# Altium PCB RFID_MODULE_S01.PcbDoc
Units mil, origin at the board's own origin, x right, y up, seen from the top; angles counter-clockwise.
Board outline 2965.03 x 1590.03 mil, 2 copper layers (Top Layer, Bottom Layer); 27 components, 16 nets, 120 pads, 12 vias.
Unrouted connection lines stored in the file: 5.
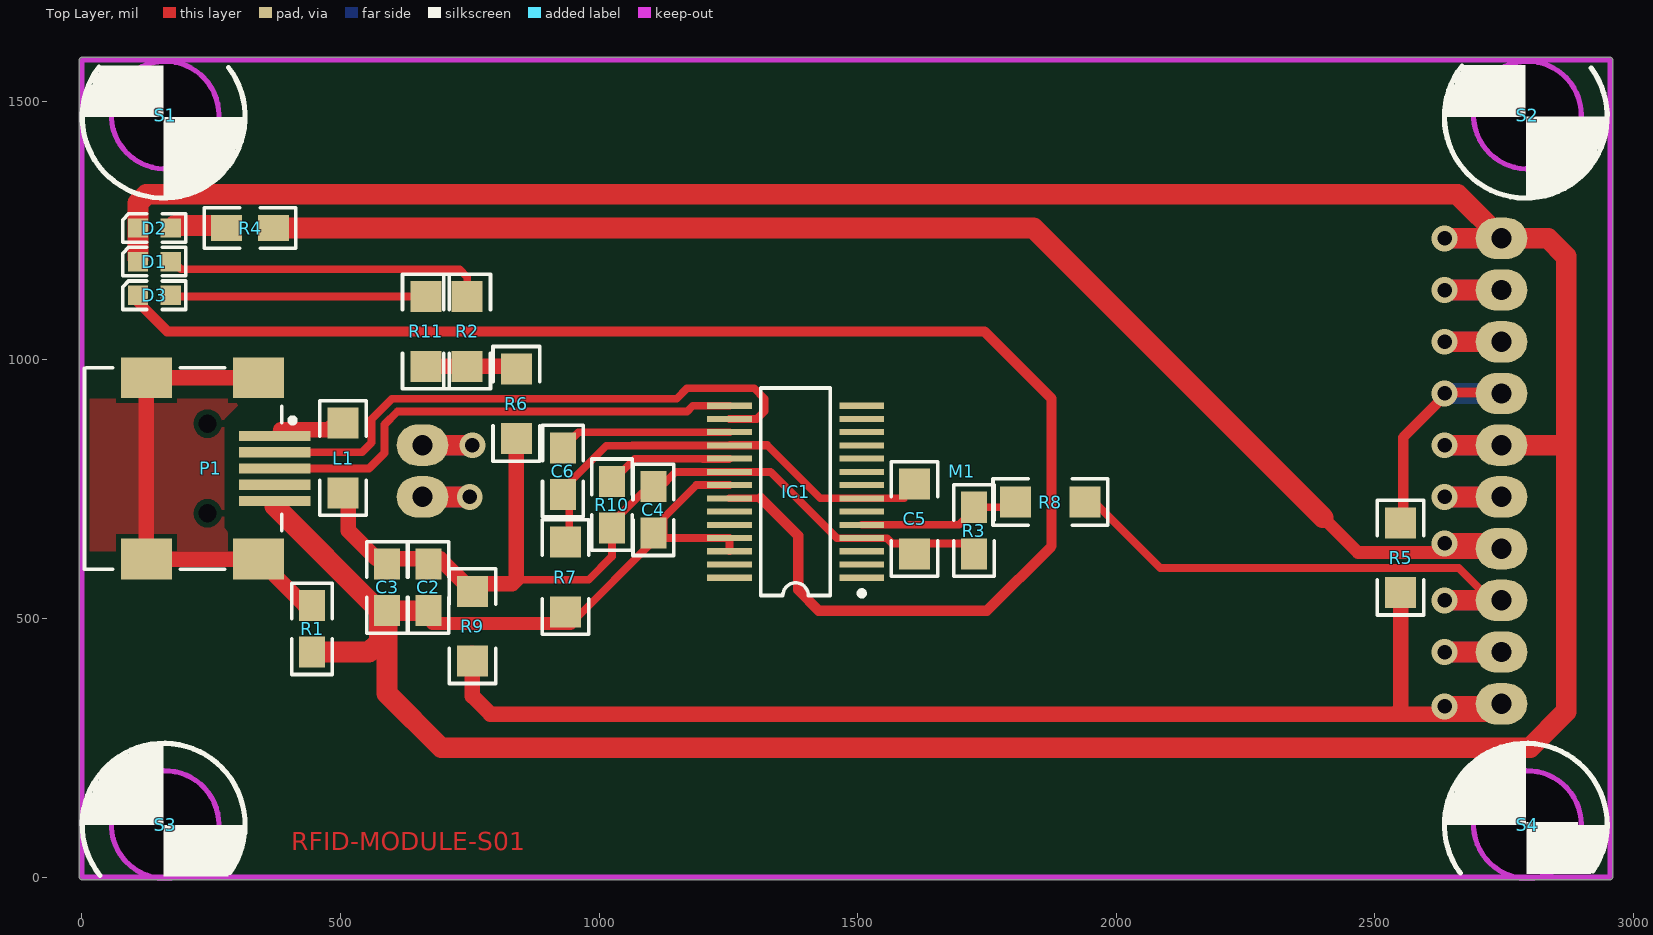
[diagram p0: Top Layer view]
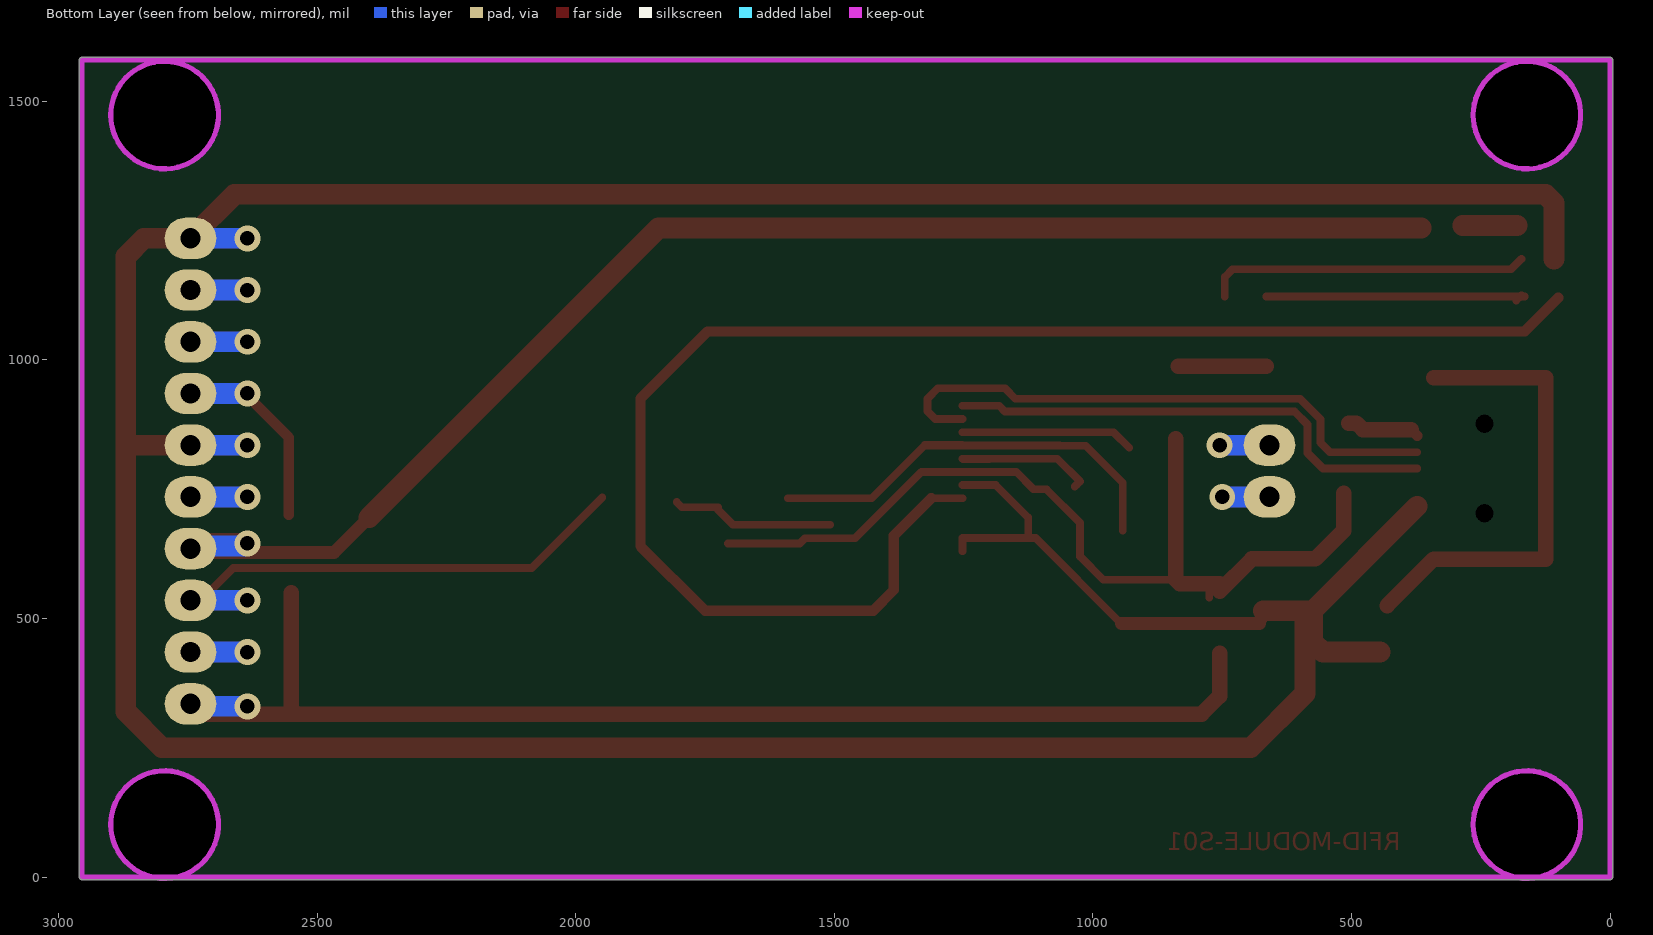
[diagram p1: Bottom Layer view, seen from below]
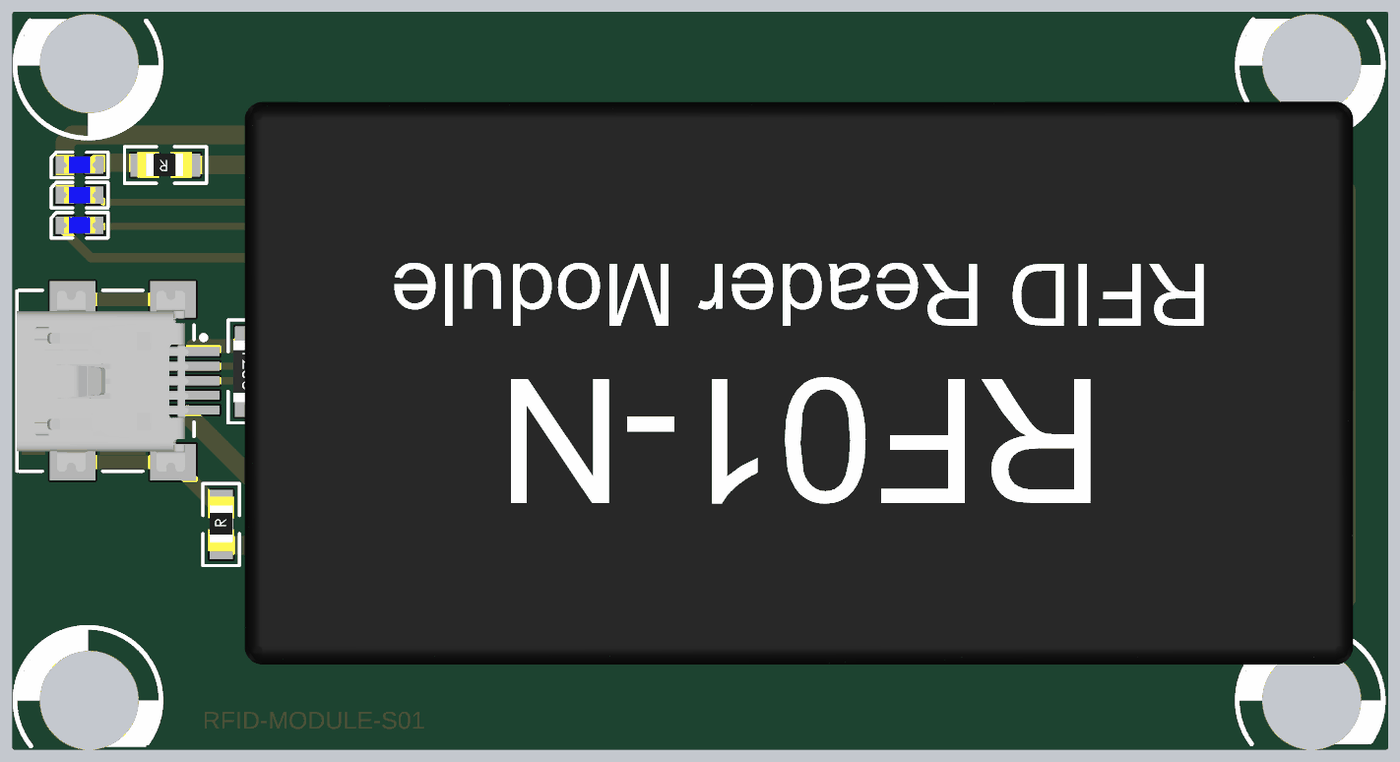
[diagram p2: 3D render of the assembled board from above, using the file's embedded part models]

## Layer stack, top to bottom
Top Solder: solder mask 0.4, Solder Resist, Dk 3.5
Top Layer: signal copper 1.4
Dielectric 1: dielectric 12.6, FR-4, Dk 4.8
Bottom Layer: signal copper 1.4
Bottom Solder: solder mask 0.4, Solder Resist, Dk 3.5

## Board outline
0,-5.01 cw(c0,0) -5.01,0 -5.01,1580 cw(c0,1580) 0,1585.02 2955,1585.02 cw(c2955,1580) 2960.01,1580 2960.01,0 cw(c2955,0) 2955,-5.01

## Design rules (kind name [scope] priority, off if disabled: settings)
Clearance [All] p1: gap=10 ignorepadtopadclearanceinfootprint=FALSE except(0: Arc-Hole Track-Hole SMDPad-Hole THPad-Hole Via-Hole Fill-Hole Poly-Hole Region-Hole Text-Hole)
ComponentClearance [All] p1 off: gap=10 collisioncheckmode=3 verticalgap=10 showdistances=FALSE
PolygonConnect [All] p1: connectstyle=Relief reliefconductorwidth=10 reliefentries=4 polygonreliefangle="90 Angle" airgapwidth=10
RoutingVias [All] p1: holewidth=28 width=50 viastyle="Through Hole" minholewidth=28 minwidth=50 maxholewidth=28 maxwidth=50
SolderMaskExpansion [All] p1: expansion=4
Width [All] p1: maxlimit=100 minlimit=10 preferedwidth=10
29 further rules are at their usual default settings.

## Components (designator, comment, footprint, x,y, rotation, side; value= is the part's Value field where it differs from the comment)
C2 "100nF" "SMD 0805" 670,560 r270 top
C3 "10uF" "SMD 0805" 590,560 r270 top
C4 "100nF" "SMD 0805" 1105,710 r270 top
C5 "100nF" "SMD 1206" 1610,692.5 r90 top
C6 "100nF" "SMD 0805" 930,785 r270 top
D1 "LED_RED" "SMD LED 0603" 140,1190 r180 top
D2 "LED_RED" "SMD LED 0603" 140,1255 r180 top
D3 "LED_RED" "SMD LED 0603" 140,1125 r180 top
IC1 "FT232R" "SMD IC SSOP28" 1380,745 r90 top
L1 "FERRIT_BEAD" "SMD 1206" 505,810 r270 top
M1 "RFID_MODULE" PCBComponent_1 1631.75,787.9 r0 top
P1 "miniUSB" "SMD USB B MINI" 248.82,790 r180 top
R1 "100R" "SMD 0805" 445,480 r90 top
R2 "330R" "SMD 1206" 745,1055 r270 top
R3 "1K" "SMD 0805" 1725,670 r270 top
R4 "470R" "SMD 0805" 325,1255 r180 top
R5 "10K" "SMD 1206" 2550,617.5 r270 top
R6 "0R" "SMD 1206" 840,915 r270 top
R7 "0R" "SMD 1206" 935,580 r90 top
R8 "0R" "SMD 1206" 1872.5,725 r0 top
R9 "0R" "SMD 1206" 755,485 r90 top
R10 "1K" "SMD 0805" 1025,720 r270 top
R11 "330R" "SMD 1206" 665,1055 r270 top
S1 "" screw#1 158.03,1470.28 r270 top
S2 "" screw#2 2792.07,1470.28 r270 top
S3 "" screw#3 158.03,101.18 r270 top
S4 "" screw#4 2792.07,101.18 r270 top

## Footprints (in the part's own frame and the unit in brackets; to place one, negate y for a bottom-side part, rotate by r counter-clockwise, add the part's x,y. Pads: shape width x height; smd on the part's side, far side on the other; paste and mask are expansions set on the pad)
PCBComponent_1 [mil]
  oval 100x80 hole 39.37: 1(1113.25,-452.9) 2(1113.25,-352.9) 3(1113.25,-252.9) 4(1113.25,-152.9) 5(1113.25,-52.9) 6(1113.25,47.1) 7(1113.25,147.1) 8(1113.25,247.1) 9(1113.25,347.1) 10(1113.25,447.1) 11(-973.25,47.1) 12(-973.2,-52.9)
  body extent -1136,-610 1253,603, height 493
screw#1 [mm]
  round 0 hole 5.4: 0(-0.08,0.07)
  silkscreen extent -2.52,-4 4,4
screw#2 [mm]
  round 0 hole 5.4: 0(-0.08,0.078)
  silkscreen extent -2.53,-4.01 4,4
screw#3 [mm]
  round 0 hole 5.4: 0(-0.005,0.07)
  silkscreen extent -4,-4 2.55,4
screw#4 [mm]
  round 0 hole 5.4: 0(-0.005,0.078)
  silkscreen extent -4,-4 2.42,4
"SMD 0805" [mil] "SMD 0805"
  round 27.56 on Mech2: 0(0,0)
  rect 60x50 smd: 1(-45,0) 2(45,0)
  silkscreen extent -88,-39 88,39, body extent -57,-28 61,27, height 21
"SMD 1206" [mil] "SMD 1206"
  round 27.56 on Mech2: 0(0,0)
  rect 60x60 smd: 1(-67.5,0) 2(67.5,0)
  silkscreen extent -111,-45 111,45, body extent -66,-34 66,34, height 33
"SMD IC SSOP28" [mm] "SSOP, 28-Leads , Pitch 0.65mm"
  oval 1x3 on Mech2: 0(-4.62,0) 0(4.62,0)
  rect 0.3x2.2 smd: 1(-4.225,-3.25) 2(-3.575,-3.25) 3(-2.925,-3.25) 4(-2.275,-3.25) 5(-1.625,-3.25) 6(-0.975,-3.25) 7(-0.325,-3.25) 8(0.325,-3.25) 9(0.975,-3.25) 10(1.625,-3.25) 11(2.275,-3.25) 12(2.925,-3.25) 13(3.575,-3.25) 14(4.225,-3.25) 15(4.225,3.25) 16(3.575,3.25) 17(2.925,3.25) 18(2.275,3.25) 19(1.625,3.25) 20(0.975,3.25) 21(0.325,3.25) 22(-0.325,3.25) 23(-0.975,3.25) 24(-1.625,3.25) 25(-2.275,3.25) 26(-2.925,3.25) 27(-3.575,3.25) 28(-4.225,3.25)
  round 1.5 on Mech2: 3(-2.31,0) 3(0,0) 3(2.31,0)
  silkscreen extent -5.11,-3.38 5.1,1.7, body extent -4.99,-3.09 4.99,3.09, height 1.75
"SMD LED 0603" [mm] "LED"
  round 0.7 on Mech2: 0(0,0)
  rect 1x0.95 smd: 1(-0.8,0) 2(0.8,0)
  silkscreen extent -1.55,-0.7 1.55,0.7, body extent -0.85,-0.45 0.85,0.45, height 0.9
"SMD USB B MINI" [mm] "Connector; USB2.0, Type AB, SM; 5 Position; Right Angle 440479"
  rect 3.5x0.5 smd: 1(-3.149,-1.6) 2(-3.149,-0.8) 3(-3.149,0) 4(-3.149,0.8) 5(-3.149,1.6)
  rect 2.5x2 smd: 6(-2.351,4.45) 7(3.149,4.45) 8(-2.351,-4.45) 9(3.149,-4.45)
  round 0.6 hole 0.9 unplated: MH1(0.149,2.2) MH2(0.149,-2.2)
  silkscreen extent -4.15,-4.95 6.19,4.95, body extent -3.2,-4.92 6.19,4.98, height 3.88

## Part data
C2 C3 C4 C5 C6: library part CAP, "Capacitor", LatestRevisionDate=17-Jul-2002, LatestRevisionNote="Re-released for DXP Platform.", PackageDescription="Radial Cap, Thru-Hole; 2 Leads; 0.3 in Pin Spacing", PackageReference=RAD-0.3, Published=8-Jun-2000, Publisher="Altium Limited"
D1 D2 D3: library part LED, "Typical INFRARED GaAs LED", LatestRevisionDate=08-Jul-2005, LatestRevisionNote="Mech Layer 1 removed.", PackageDescription="LED; 2 Leads", PackageReference=LED-0, Published=8-Jun-2000, Publisher="Altium Limited"
L1: library part INDUCTOR, "Inductor"
P1: library part "CON miniUSB Female SMD"
R1 R2 R3 R4 R5 R6 R7 R8 R9 R10 R11: library part RES, "Resistor"
S1 S2 S3 S4: library part SCREW, "Typical Screw"

## Via types
v1: diameter 50, hole 28, Top Layer to Bottom Layer, 12 vias

## Nets (pads, with @x,y where several pads share a name; then routed paths per layer and width w, separated by ;. In a path a pad name is that pad's centre, name@x,y a point inside that pad or via, vN(x,y) a via of type N, cw(c..) or ccw(c..) an arc to the next point about the centre after c; other vN are vias at no path point)
GND: C2.2 C3.2 C4.2 C5.2 C6.2 D1.2 D2.2 IC1.7 IC1.18 IC1.21 IC1.25 IC1.26 M1.6 M1.10 P1.5 R1.1 R7.1 R7.2 | length 9193.9
  Top Layer w15: C2.2@670,497.5 C2.2@677.5,490 ; R7.2@942.5,670 942.5,762.25 1014.23,833.98 1063.98,833.98 1064.57,834.57 IC1.18 ; R7.1@945,490 1110.43,655.43 C4.2@1125,655.43 ; IC1.26 IC1.25 C4.2@1125,655.43 ; IC1.21 1187.8,757.8 1125,695 C4.2@1125,655.43 ; 1325.43,835.16 1252.64,835.16 IC1.18 ; C5.2@1590,732.2 IC1.7 1427.8,732.2 1325.43,834.57 IC1.18
  Top Layer w25: C2.2@677.5,490 R7.1@945,490
  Top Layer w40: D1.2@108.5,1195 D2.2 108.5,1303.5 125,1320 2660,1320 M1.10 ; P1.5@372.81,717.2 C3.2@575,515 ; R1.1 555,435 575,455 C3.2@575,515 ; C2.2 C3.2 ; v1(2635,835) M1.6 2870,835 ; v1(2635,1235) M1.10 ; C3.2@575,515 C3.2 ; C3.2 590,355 695,250 2800,250 2870,320 2870,835 ; M1.10 2835,1235 2870,1200 2870,835
  Bottom Layer w40: v1@2641.75,835 M1.6@2738.25,835 ; v1@2641.75,1235 M1.10@2738.25,1235
NetD1_1: D1.1 R2.1 | length 653.8
  Top Layer w15: R2.1 745,1160.01 730,1175.01 191.48,1175.01 ; 191.48,1175.01 171.5,1195 191.48,1175.01
NetD2_1: D2.1 R4.2 | length 105
  Top Layer w40: D2.1@180,1260 R4.2@285,1260
NetD3_1: D3.1 R11.1 | length 514.1
  Top Layer w15: D3.1@165,1122.5 171.5,1122.5 D3.1@174,1122.5 ; D3.1 D3.1@174,1122.5 ; D3.1@181.5,1115 D3.1@174,1122.5 ; R11.1 D3.1@174,1122.5
NetM1_4: M1.4 R4.1 | length 2849.5
  Top Layer w25: 2400,695 2467.5,627.5 2737.5,627.5 M1.4
  Top Layer w40: R4.1@365,1255 1840,1255 2400,695 ; v1(2635,645) M1.4@2745,645
  Bottom Layer w40: v1@2641.75,640 M1.4@2738.25,640
NetM1_7: M1.7 R5.1 | length 450.3
  Top Layer w20: R5.1@2555,700 2555,850 2642.05,937.05 M1.7@2722.73,937.05
  Bottom Layer w40: v1@2641.75,935 M1.7@2738.25,935
  other v1: 2635,935
P_FT232_3.3V_OUT: C6.1 IC1.17 | length 334.5
  Top Layer w15: C6.1 960.16,860.16 IC1.17
P_FT232_RESET: IC1.19 R10.1 | length 302.9
  Top Layer w15: R10.1 1068.98,808.98 IC1.19 1251.46,808.39 1200.63,808.39 ; R10.1@1030.79,759.22 R10.1@1035,755
P_RXLED: D3.2 IC1.22 | length 2967
  Top Layer w15: IC1.22 1312.8,732.2
  Top Layer w20: D3.2@100,1120 101.75,1118.25 165,1055 1745,1055 1875,925 1875,640 1750,515 1425,515 1385,555 1385,660 1312.8,732.2
P_TXDEN: IC1.13
P_USB_D+: IC1.15 P1.3 | length 961.7
  Top Layer w15: P1.3 555,790 585,820 585,875 610,900 1170,900 1181.34,911.34 IC1.15
P_USB_D-: IC1.16 P1.2 | length 1131.6
  Top Layer w15: P1.2 541.5,821.5 560,840 560,885.36 599.64,925 1150,925 1170,945 1300,945 1320,925 1320,900.75 1305,885.75 IC1.16
PURX: IC1.5 M1.3 R3.1 R8.1 R8.2 | length 1397.4
  Top Layer w15: IC1.5 1696.02,681.02 1725,710 R3.1 1795,715 R8.1 ; R8.2@1948.75,733.75 2085,597.5 2662.5,597.5 M1.3@2735,525
  Top Layer w40: v1(2635,535) M1.3
  Bottom Layer w40: v1@2636.75,535 M1.3@2733.25,535
USB_SHIELD: P1.6 P1.7 P1.8 P1.9 R1.2 | length 910.5
  Top Layer w30: P1.8 P1.9 P1.7 P1.6 R1.2@431.17,525
USB_VCC: L1.1 P1.1 | length 142.3
  Top Layer w20: P1.1 384.81,865
  Top Layer w30: 384.81,865 477.99,865 490.49,877.5 L1.1
VCC: C2.1 C3.1 C4.1 C5.1 IC1.4 IC1.20 L1.2 M1.1 R2.2 R3.2 R5.2 R6.1 R6.2 R9.1 R9.2 R10.2 R11.2 | length 4572.8
  Top Layer w15: R9.2@775,540 775,567.5 775,575 840,575 980,575 1025,620 1025,685 1090,750 1115,750 1148.39,783.39 IC1.20 1331.61,783.39 1460,655 1556.76,655 1566.76,645 R3.2@1705.43,645 ; R6.1@835,987.5 R6.1 ; M1.1@2715,315 2725,325 M1.1@2725,335
  Top Layer w30: L1.2@515,742.5 515,670 570,615 692.5,615 R9.2 ; R11.2 R2.2 R6.1@835,987.5 ; R9.1@755,432.5 755,350 790,315 2540,315 ; R9.2@755,567.5 775,567.5 832.5,567.5 840,575 R6.2 ; R5.2 2550,325 2540,315 ; M1.1@2715,315 2540,315
  Top Layer w40: v1(2635,330) M1.1@2745,330
  Bottom Layer w40: v1@2631.75,330 M1.1@2728.25,330
pads on no net: C2.0 C3.0 C4.0 C5.0 C6.0 D1.0 D2.0 D3.0 IC1.0 IC1.1 IC1.2 IC1.3 IC1.6 IC1.8 IC1.9 IC1.10 IC1.11 IC1.12 IC1.14 IC1.23 IC1.24 IC1.27 IC1.28 L1.0 M1.2 M1.5 M1.8 M1.9 M1.11 M1.12 P1.4 P1.MH1 P1.MH2 R1.0 R2.0 R3.0 R4.0 R5.0 R6.0 R7.0 R8.0 R9.0 R10.0 R11.0 S1.0 S2.0 S3.0 S4.0
copper on no net: | length 1239
  Top Layer w40: 640,735 v1(750,735) ; 645,835 v1(755,835) ; v1(2635,435) 2745,435 ; v1(2635,735) 2745,735 ; v1(2635,1035) 2745,1035 ; v1(2635,1135) 2745,1135
  Bottom Layer w40: 651.75,735 v1@748.25,735 ; 658.5,835 v1(755,835) ; v1@2636.75,435 2733.25,435 ; v1@2636.75,1035 2733.25,1035 ; v1@2641.75,1135 2738.25,1135 ; v1@2646.75,735 2743.25,735

## Polygon pours and split planes (outlines as drawn)
USB_SHIELD on Top Layer "Top Layer-USB_SHIELD" (solid, remove dead copper, pour order 0): 10,925 10,630 315,630 275,675 275,885 315,925

## Keep-outs
Keep-Out Layer:
  circle w10: c160.79,101.38 r104.04
  circle w10: c2795.12,101.38 r104.04
  circle w10: c2795.12,1473.43 r104.04
  circle w10: c160.79,1473.43 r104.04
  lines w10: 0,0 2955,0 2955,1580 0,1580 0,0

## Other copper
Top Layer:
  text "RFID-MODULE-S01" at 405,40 h60